# Altium PCB PCB-2024316-000A_NTB.pcbdoc
Units mm, origin at the board's own origin, x right, y up, seen from the top; angles counter-clockwise.
Board outline 24 x 76 mm, 2 copper layers (Top Layer, Bottom Layer), stack 1.571 mm thick; 49 components, 27 nets, 167 pads, 42 vias.
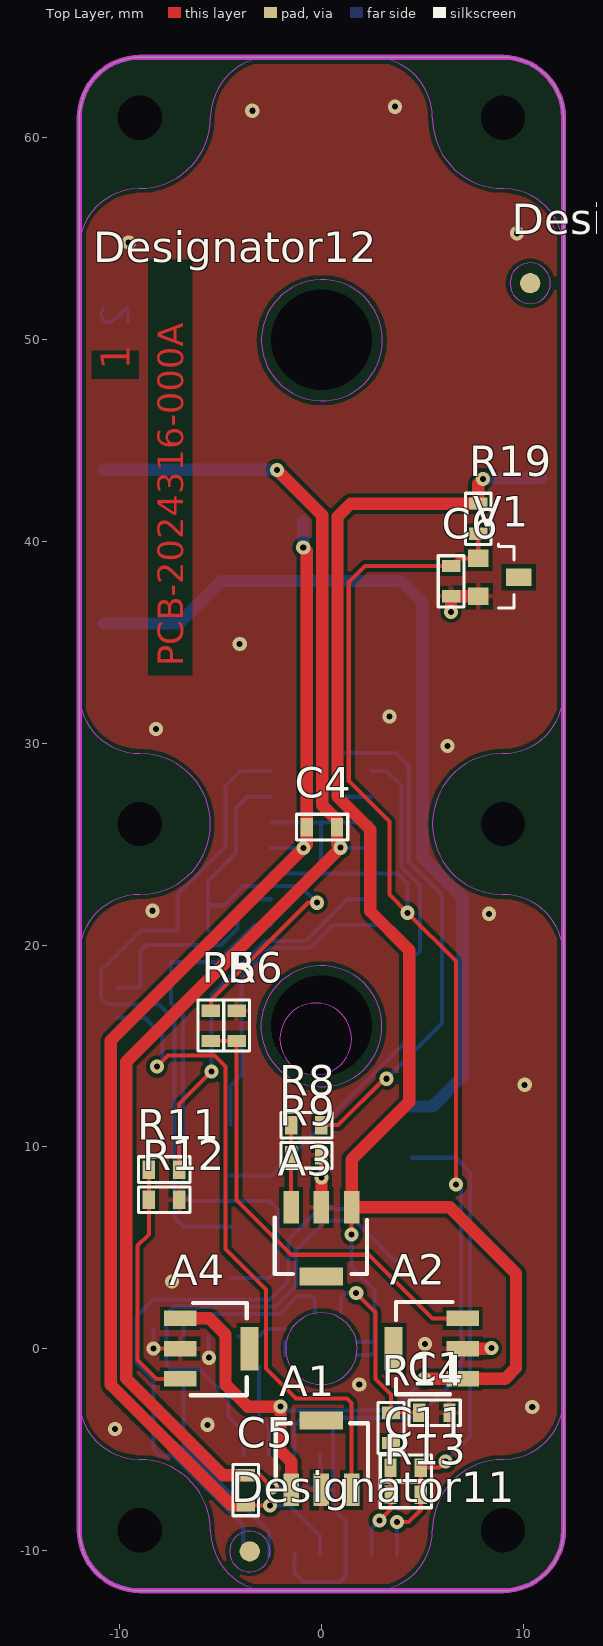
[diagram p0: Top Layer view]
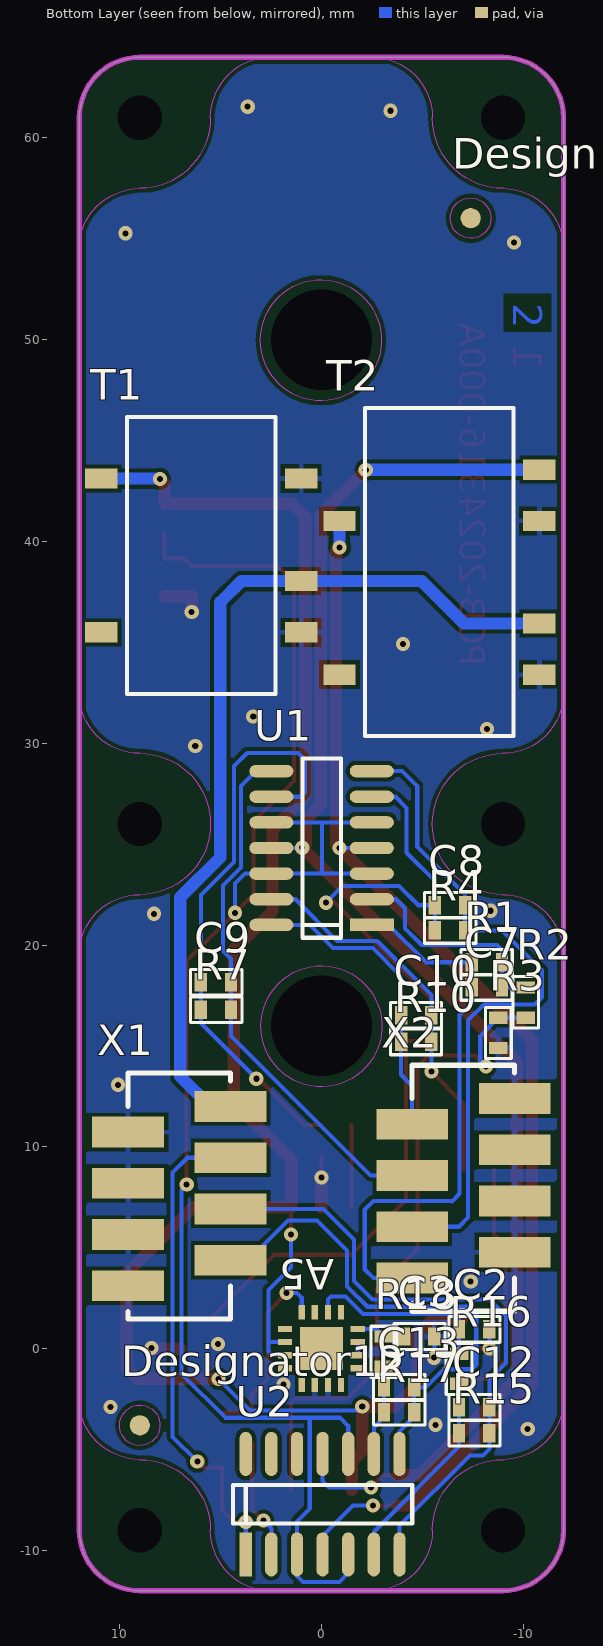
[diagram p1: Bottom Layer view, seen from below]
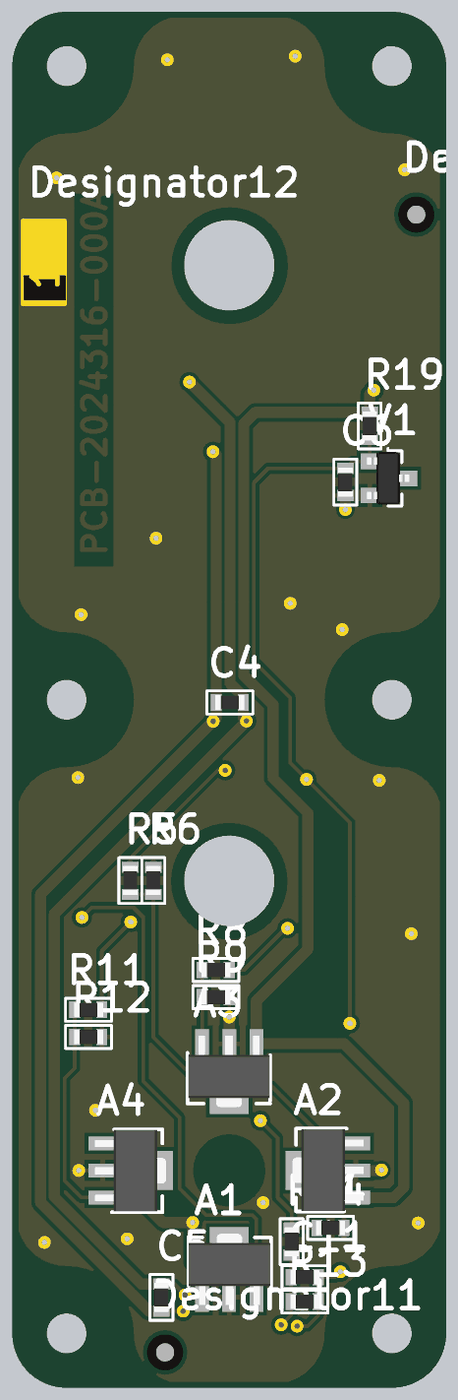
[diagram p2: 3D render of the assembled board from above, using the file's embedded part models]
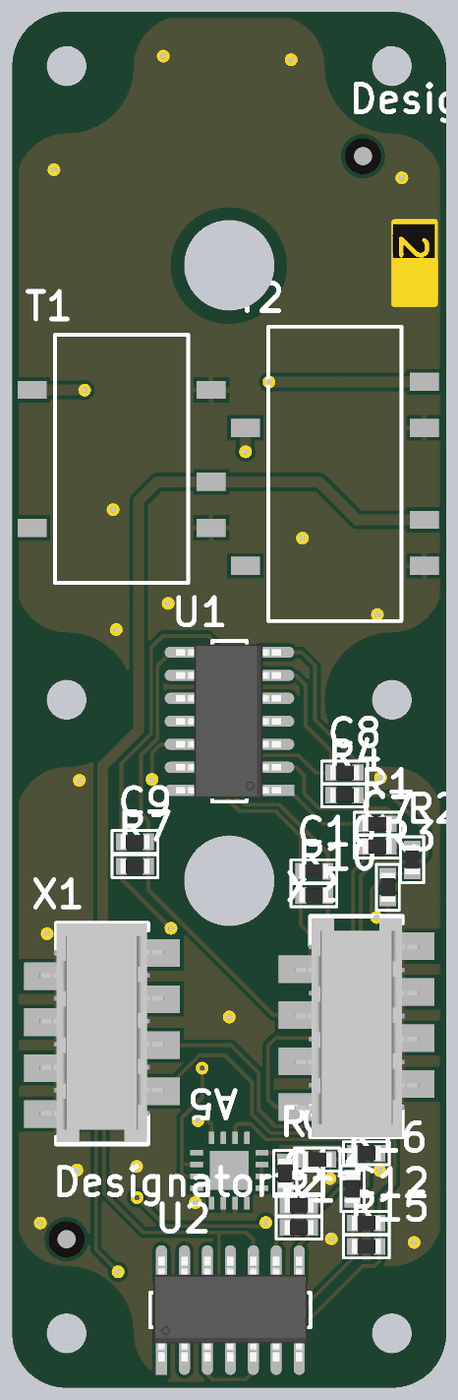
[diagram p3: 3D render of the assembled board from below, using the file's embedded part models]

## Layer stack, top to bottom
Top Layer: signal copper 0.0356
Dielectric: core 1.5, FR-4, Dk 4.8
Bottom Layer: signal copper 0.0356

## Board outline
-12,-9 ccw(c-9,-9) -9,-12 9,-12 ccw(c9,-9) 12,-9 12,61 ccw(c9,61) 9,64 -9,64 ccw(c-9,61) -12,61

## Design rules (kind name [scope] priority, off if disabled: settings)
Clearance Clearance_Polygon [InPolygon] p1: gap=0.203
Clearance [All] p2: gap=0.152
FabricationTestPointUsage TestPointUsage [All] p1: valid=0 allowmultiple=FALSE
FabricationTestpoint Testpoint [All] p1: side=3 testpointundercomponent=TRUE minsize=1.016 maxsize=2.54 preferedsize=1.524 minholesize=0 maxholesize=1.016 preferedholesize=0.813 testpointgrid=0.025 allowsidetop=TRUE allowsidebottom=TRUE usegrid=TRUE gridtolerance=0
HoleSize [All] p1: absolutevalues=TRUE maxlimit=5 minlimit=0.025 maxpercent=80.000 minpercent=20.000
PolygonConnect PolygonConnect_direct [IsVia] p1: connectstyle=Direct reliefconductorwidth=0.254 reliefentries=4 polygonreliefangle="90 Angle"
PolygonConnect [All] p2: connectstyle=Relief reliefconductorwidth=0.254 reliefentries=4 polygonreliefangle="90 Angle"
RoutingVias [All] p1: holewidth=0.3 width=0.7 viastyle="Through Hole" minholewidth=0.3 minwidth=0.7 maxholewidth=0.3 maxwidth=0.7
SilkscreenOverComponentPads [All] p1: minsilkscreentomaskgap=0.254
SolderMaskExpansion [All] p1: expansion=0
Width [All] p1: maxlimit=0.61 minlimit=0.152 preferedwidth=0.203
24 further rules are at their usual default settings.

## Classes and differential pairs
component class EEROS_Sensorplatine: A1 A2 A3 A4 A5 C1 C2 C3 C4 C5 C6 C7 C8 C9 C10 C11 C12 C13 R1 R2 R3 R4 R5 R6 R7 R8 R9 R10 R11 R12 R13 R14 R15 R16 R17 R18 R19 T1 T2 U1 U2 V1 X1 X2

## Components (designator, comment, footprint, x,y, rotation, side; value= is the part's Value field where it differs from the comment)
A1 "SS59ET" SM/SOT89_1234 -1.5,-7 r0 top
A2 "SS59ET" SM/SOT89_1234 7,-1.5 r90 top
A3 "SS59ET" SM/SOT89_1234 1.5,7 r180 top
A4 "SS59ET" SM/SOT89_1234 -7,1.5 r270 top
A5 "LIS344AL" QFN.65M/16/WG4.00 0.975,-1.8 r90 bottom locked
C1 "6.8nF" SM/C_0603_REFLOW 4.85,-3.175 r0 top
C2 "6.8nF" SM/C_0603_REFLOW -6.825,0.95 r180 bottom
C3 "6.8nF" SM/C_0603_REFLOW -4.1,0.6 r180 bottom
C4 "100nF" SM/C_0603_REFLOW -0.725,25.85 r0 top
C5 "100nF" SM/C_0603_REFLOW -3.75,-7.775 r90 top
C6 "100nF" SM/C_0603_REFLOW 6.426,38.786 r270 top
C7 "np" SM/C_0603_REFLOW -8.95,17.9 r0 bottom
C8 "np" SM/C_0603_REFLOW -5.625,21.975 r180 bottom
C9 "np" SM/C_0603_REFLOW 5.975,18.15 r180 bottom
C10 "np" SM/C_0603_REFLOW -5.45,16.525 r0 bottom
C11 "np" SM/C_0603_REFLOW 3.425,-5.9 r0 top
C12 "np" SM/C_0603_REFLOW -6.825,-2.9 r180 bottom
C13 "np" SM/C_0603_REFLOW -3.1,-1.925 r180 bottom
Designator10 "Comment" FIDUCIAL 10.35,52.8 r0 top
Designator11 "Comment" FIDUCIAL -3.55,-10.05 r0 top
Designator12 "Comment" "LAYER LAYER2" -9.375,47.625 r90 top
Designator12 "Comment" FIDUCIAL 9,-3.8 r180 bottom
Designator13 "Comment" FIDUCIAL -7.4,56.025 r180 bottom
R1 "680K" SM/R_0603_REFLOW -8.95,19.15 r0 bottom
R2 "100K" SM/R_0603_REFLOW -10.125,16.4 r90 bottom
R3 "1.0K" SM/R_0603_REFLOW -8.775,16.4 r270 bottom
R4 "680K" SM/R_0603_REFLOW -5.625,20.725 r180 bottom
R5 "100K" SM/R_0603_REFLOW -5.475,15.25 r90 top
R6 "1.0K" SM/R_0603_REFLOW -4.2,15.25 r90 top
R7 "680K" SM/R_0603_REFLOW 5.975,16.8 r180 bottom
R8 "100K" SM/R_0603_REFLOW -1.5,11.075 r0 top
R9 "1.0K" SM/R_0603_REFLOW -1.5,9.575 r0 top
R10 "680K" SM/R_0603_REFLOW -5.45,15.2 r0 bottom
R11 "100K" SM/R_0603_REFLOW -8.55,8.875 r0 top
R12 "1.0K" SM/R_0603_REFLOW -8.55,7.375 r0 top
R13 "130K" SM/R_0603_REFLOW 3.425,-7.25 r0 top
R14 "33K" SM/R_0603_REFLOW 3.45,-3.175 r270 top
R15 "130K" SM/R_0603_REFLOW -6.825,-4.2 r180 bottom
R16 "33K" SM/R_0603_REFLOW -6.825,-0.25 r270 bottom
R17 "130K" SM/R_0603_REFLOW -3.1,-3.15 r180 bottom
R18 "33K" SM/R_0603_REFLOW -3.1,0.6 r270 bottom
R19 "1.0K" SM/R_0603_REFLOW 7.772,41.885 r270 top
T1 "TES1-2411" TES1_SINGLE 1,35.5 r90 bottom
T2 "TES1-2422" TES1_DUAL -10.8,33.4 r90 bottom
U1 "LM324" SOG.050/14/WG.244/L.350 -2.5,21 r90 bottom
U2 "LM324" SOG.050/14/WG.244/L.350 3.75,-10.2 r180 bottom
V1 "LM4040CIM3-2.5" SM/SOT23_123 7.772,37.287 r270 top
X1 "7-188275-8" MICRO-MATCH_8P_SMD 4.5,12 r90 bottom
X2 "7-188275-8" MICRO-MATCH_8P_SMD -4.5,3.5 r270 bottom

## Footprints (in the part's own frame and the unit in brackets; to place one, negate y for a bottom-side part, rotate by r counter-clockwise, add the part's x,y. Pads: shape width x height; smd on the part's side, far side on the other; paste and mask are expansions set on the pad)
FIDUCIAL [mm]
  round 1 smd mask+0.5: 1(0,0)
  Top Layer pour cut-out: 0.3,1.127 0.302,1.126 0.583,1.01 0.585,1.009 0.824,0.826 0.824,0.824 0.826,0.824 1.009,0.585 1.01,0.583 1.011,0.582 1.126,0.304 1.126,0.302 1.127,0.301 1.166,0.001 1.167,0 1.165,-0.004 1.164,-0.008 1.163,-0.009 1.163,-0.01 1.16,-0.011 1.16,-0.011 1.161,-0.012 1.162,-0.016 1.164,-0.02 1.164,-0.021 1.164,-0.022 1.127,-0.3 1.126,-0.302 1.126,-0.304 1.011,-0.582 1.01,-0.583 1.009,-0.585 0.826,-0.824 0.824,-0.824 0.824,-0.826 0.585,-1.009 0.583,-1.01 0.582,-1.011 0.304,-1.126 0.302,-1.126 0.3,-1.127 0.002,-1.166 0,-1.166 -0.002,-1.166 -0.3,-1.127 -0.302,-1.126 -0.304,-1.126 -0.582,-1.011 -0.583,-1.01 -0.585,-1.009 -0.824,-0.826 -0.824,-0.824 -0.826,-0.824 -1.009,-0.585 -1.01,-0.583 -1.011,-0.582 -1.126,-0.304 -1.126,-0.302 -1.127,-0.3 -1.166,-0.002 -1.166,0 -1.166,0.002 -1.127,0.3 -1.126,0.302 -1.126,0.304 -1.011,0.582 -1.01,0.583 -1.009,0.585 -0.826,0.824 -0.824,0.824 -0.824,0.826 -0.585,1.009 -0.583,1.01 -0.582,1.011 -0.304,1.126 -0.302,1.126 -0.3,1.127 -0.002,1.166 0,1.166 0.002,1.166
  Top Layer keep-out circle w0.025: c0,0 r1.005
"LAYER LAYER2" [mm]
MICRO-MATCH_8P_SMD [mil]
  rect 60x140 smd: 1(0,0) 2(-50,200) 3(-100,0) 4(-150,200) 5(-200,0) 6(-250,200) 7(-300,0) 8(-350,200)
  silkscreen extent -415,0 65,200, body extent -411,-35 65,236, height 209
QFN.65M/16/WG4.00 [mil]
  rect 27.57x12 smd: 1(0,0) 2(0,-25.58) 3(0,-51.18) 4(0,-76.77) 9(141.73,-76.77) 10(141.73,-51.18) 11(141.73,-25.58) 12(141.73,0)
  rect 12x27.57 smd: 5(32.48,-109.25) 6(58.07,-109.25) 7(83.67,-109.25) 8(109.25,-109.25) 13(109.25,32.48) 14(83.67,32.48) 15(58.07,32.48) 16(32.48,32.48)
  rect 84x84 smd: M1(70.87,-38.38)
SM/C_0603_REFLOW [mil]
  rect 24x36 smd: 1(0,0) 2(59,0)
  silkscreen extent -20,-25 80,25, body extent -1,-16 61,16, height 16
SM/R_0603_REFLOW [mil]
  rect 24x36 smd: 1(0,0) 2(59,0)
  silkscreen extent -20,-25 80,25, body extent -1,-16 61,16, height 16
SM/SOT23_123 [mil]
  rect 34x40 smd: 1(-74,0) 2(0,0)
  rect 34x50 smd: 3(-37,79)
  silkscreen extent -102,40 23,70, body extent -95,-6 20,86, height 39
SM/SOT89_1234 [mil]
  rect 30x63 smd: 1(0,0) 2(59,0) 3(118,0)
  rect 85x35 smd: 4(59,135)
  silkscreen extent -30,20 150,130, body extent -29,-17 148,138, height 55
SOG.050/14/WG.244/L.350 [mil]
  rect 24x86 smd: 1(0,0)
  oval 24x86 smd: 2(50,0) 3(100,0) 4(150,0) 5(200,0) 6(250,0) 7(300,0) 8(300,196) 9(250,196) 10(200,196) 11(150,196) 12(100,196) 13(50,196) 14(0,196)
  silkscreen extent -25,60 325,136, body extent -18,-14 318,214, height 69
TES1_DUAL [mm]
  rect 1x1.6 smd: 1(0,0) 3(2.54,0) 7(7.62,0) 9(10.16,0) 12(7.62,9.906) 18(0,9.906)
  silkscreen extent -3.05,1.27 13.21,8.64, body extent -3.05,1.02 13.21,8.89, height 7.11
TES1_SINGLE [mm]
  rect 1x1.6 smd: 1(0,0) 3(2.54,0) 7(7.62,0) 8(7.62,9.906) 14(0,9.906)
  silkscreen extent -3.05,1.27 10.67,8.64, body extent -3.05,1.02 10.67,8.89, height 7.11

## Part data
A1 A2 A3 A4: library part 2024317, "S_ SEN MAGNE SS59ET_________________ ___"
A5: library part 2024318, "S_ SEN ACCEL LIS344AL_______________ ___"
C1 C2 C3: library part 239551, "SC CAP __0603 __6n80 _50V ___10% X7R ___"
C4 C5 C6: library part 208013, "SC CAP __0603 100N00 _25V 80/20% Y5V ___"
C7 C8 C9 C10 C11 C12 C13: library part "CAP NP"
R1 R4 R7 R10: library part 226186, "SC RES __0603 680K00 __0W1 ___1% T100 __"
R2 R5 R8 R11: library part 200141, "SC RES __0603 100K00 __0W1 ___1% T100 __"
R3 R6 R9 R12 R19: library part 200139, "SC RES __0603 __1K00 __0W1 ___1% T100 __"
R13 R15 R17: library part 240657, "SC RES __0603 130K00 __0W1 ___1% T100 __"
R14 R16 R18: library part 204505, "SC RES __0603 _33K00 __0W1 ___1% T100 __"
T1: library part 2024319, "SS CNV TES1-2411________ _____5V _1W0 DD"
T2: library part 2024320, "SD CNV TES1-2422________ _+/-12V _1W0 DD"
U1 U2: library part 204061, "S_ IC_ _____SO14 LM324M*/NOPB________ __"
V1: library part 206446, "S_ IC_ ____SOT23 LM4040CIM3-2.5/NOPB_ __"
X1 X2: library part 249627, "S_ CON F ST ____ ___8P ____ __ R1.27 ___"

## Free pads (board coordinates)
  round 0.025 hole 2.2 unplated: 0(-9,-9) 0(-9,26) 0(-9,61) 0(9,-9) 0(9,26) 1(9,61)
  round 0.025 hole 5 unplated: 0(0,16) 0(0,50)

## Via types
v1: diameter 0.7, hole 0.3, Top Layer to Bottom Layer, 42 vias

## Nets (pads, with @x,y where several pads share a name; then routed paths per layer and width w, separated by ;. In a path a pad name is that pad's centre, name@x,y a point inside that pad or via, vN(x,y) a via of type N, cw(c..) or ccw(c..) an arc to the next point about the centre after c; other vN are vias at no path point)
+5V: A1.1 A2.1 A3.1 A4.1 A5.14 A5.15 R19.1 T1.8 | length 97.1
  Top Layer w0.203: v1(1.5,5.65) A3.1
  Top Layer w0.61: A4.1 -5.55,1.5 -4.75,0.7 -4.75,-1.775 -3.65,-2.875 v1(-2.025,-2.875) -2.025,-5.075 -1.5,-5.6 A1.1 ; v1(5.1,-1.5) A2.1 9.1,-1.5 9.65,-0.95 9.65,3.725 6.375,7 A3.1 1.5,9.375 4.35,12.225 4.35,19.75 2.425,21.675 2.425,25.725 0.799,27.351 0.799,41.224 1.45,41.875 7.763,41.875 R19.1 7.772,42.875 v1(8.001,43.104)
  Bottom Layer w0.203: v1(-2.025,-2.875) -1.825,-3.075 -1.083,-3.075 -1.077,-3.069 3.531,-3.069 v1(5.1,-1.5) ; v1(1.5,5.65) 1.5,4.025 2.625,2.9 2.625,0.325 ; A5.15 2.45,-0.325 2.625,-0.15 2.625,0.325 ; A5.14 2.625,0.325
  Bottom Layer w0.61: v1(8.001,43.104) 8.017,43.12 T1.8
+12V: C4.1 C5.1 T2.12 U1.4 U2.4 | length 63
  Top Layer w0.203: C5.1 v1(-2.55,-7.775)
  Top Layer w0.61: C5.1 -4.45,-7.775 -10.437,-1.788 -10.437,15.263 v1(-0.89,24.81) -0.725,24.975 C4.1 -0.725,39.525 v1(-0.9,39.7)
  Bottom Layer w0.203: v1(-2.55,-7.775) -1.575,-7.775 -0.06,-9.29 U2.4@-0.06,-10.25 ; U1.4 v1(-0.89,24.81)
  Bottom Layer w0.61: v1(-0.9,39.7) -0.894,39.706 T2.12
+24V: T1.3 T2.3 X1.1 | length 44.6
  Bottom Layer w0.61: T2.3 -7.06,35.94 -4.96,38.04 T1.3 3.96,38.04 5.011,36.989 5.011,24.348 7,22.359 7,13.5 5.5,12 X1.1
-12V: C4.2 C5.2 T2.9 U1.11 U2.11 | length 74.3
  Top Layer w0.203: C5.2 -3.049,-6.276 v1(-2.45,-6.875)
  Top Layer w0.61: C5.2 -4.871,-6.276 -9.675,-1.472 -9.675,14.2 v1(0.95,24.825) 0.774,25.001 C4.2 0.774,26.201 0.037,26.938 0.037,41.313 v1(-2.2,43.55)
  Bottom Layer w0.203: v1@-2.45,-6.75 v1(-2.45,-6.875) -0.375,-6.875 -0.06,-6.56 U2.11@-0.06,-5.272 ; v1(0.95,24.825) 0.965,24.81 U1.11
  Bottom Layer w0.61: T2.9 -2.21,43.56 v1(-2.2,43.55)
ACCX: C11.2 R13.2 U2.1 X1.3 | length 24.5
  Top Layer w0.203: v1(3.75,-8.6) 4.325,-8.6 4.924,-8.001 R13.2 C11.2 5.85,-5.9 v1(6.15,-5.6)
  Bottom Layer w0.203: U2.1@3.75,-10.25 v1(3.75,-8.6) ; X1.3 6.64,9.46 7.375,8.725 7.375,-4.375 v1(6.15,-5.6)
ACCY: C12.2 R15.2 U2.7 X1.5 | length 31.5
  Bottom Layer w0.203: U2.7@-3.87,-10.25 -3.87,-8.777 -7.36,-5.288 -8.012,-5.288 -8.324,-4.976 R15.2 C12.2 -8.324,-1.55 -9.15,-0.724 -9.15,1.611 -8.331,2.431 -2.544,2.431 -1.625,3.35 -1.625,5.4 -0.105,6.92 X1.5
ACCZ: C13.2 R17.2 U2.8 X1.7 | length 25.7
  Bottom Layer w0.203: U2.8@-3.87,-5.272 -3.87,-4.105 -4.599,-3.376 R17.2 C13.2 -5.15,-1.925 -6.05,-1.025 -7.45,-1.025 -7.675,-0.8 -7.675,1.725 -7.325,2.075 -2.275,2.075 -1.269,3.081 -1.269,4.856 0.225,6.35 1.654,6.35 2.104,5.9 2.104,5.896 3.62,4.38 X1.7
GND: A1.2 A2.2 A3.2 A4.2 A5.2 A5.3 A5.5 A5.6 A5.7 C1.2 C2.2 C3.2 C6.2 R3.2 R6.2 R9.2 R12.2 T1.1 T1.7 T2.1 T2.7 V1.2 X1.2 X1.4 X1.6 X1.8 X2.2 X2.4 X2.6 X2.8 | length 10.1
  Top Layer w0.203: v1(-8.325,0) -8.324,0.001 A4.2 ; R9.2 v1(0,8.475) v1(0,8.475)
  Top Layer w0.61: v1(0,8.475) 0.001,8.474 A3.2 ; v1(6.426,36.5) C6.2 V1.2 ; A2.2 8.399,-0.001 v1(8.425,0.025)
  Bottom Layer w0.203: v1(-8.325,0) -8.324,0.001 C2.2 ; C3.2 -5.599,-0.426 v1(-5.575,-0.45) ; A5.6 A5.7
  other v1: -10.225,-3.975 -5.65,-3.775 10.451,-2.9 1.876,-1.775 5.126,0.225 -7.4,3.325 10.076,13.075 8.301,21.55 -8.374,21.7 6.251,29.875 -8.199,30.7 3.376,31.325 -4.049,34.925 -9.549,54.825 9.701,55.275 -3.424,61.35 3.651,61.55
HAL1: C7.2 R1.2 U1.1 X2.1 | length 28
  Bottom Layer w0.203: X2.1 -2.575,3.5 -2.15,3.925 -2.15,6.9 -2.575,7.325 -6.45,7.325 -6.475,7.3 -6.85,7.675 -6.85,16.525 -7.451,17.126 C7.2 R1.2 -5.175,19.15 -3.325,21 U1.1
HAL2: C8.2 R4.2 U1.7 X2.3 | length 33.5
  Bottom Layer w0.203: X2.3 -6.815,6.04 -7.275,6.5 -7.275,16.275 -8.05,17.05 -10.575,17.05 -10.925,17.4 -10.925,18.75 -8.95,20.725 R4.2 C8.2 -7.124,22.501 -4.75,24.875 -4.75,27.875 -4.005,28.62 U1.7
HAL3: C9.2 R7.2 U1.8 X2.5 | length 26.6
  Bottom Layer w0.203: X2.5 -2.445,8.58 4.476,15.501 R7.2 C9.2 4.476,19.301 4.879,19.704 4.879,22.946 4.631,23.194 4.631,23.197 3.975,23.853 3.975,27.875 3.23,28.62 U1.8
HAL4: C10.2 R10.2 U1.14 X2.7 | length 15.9
  Bottom Layer w0.203: X2.7 -4.5,13.025 -3.951,13.574 R10.2 C10.2 -3.951,18.449 -2.55,19.85 -0.575,19.85 0.575,21 U1.14 U1.14@3.3,21
NetA1_3: A1.3 R2.1 R3.1 | length 33.2
  Top Layer w0.203: v1(-8.15,13.975) -7.6,14.525 -5.3,14.525 -4.756,13.981 -4.756,4.931 -2.75,2.925 -2.75,-0.984 -1.259,-2.475 1.272,-2.475 1.497,-2.7 A1.3
  Bottom Layer w0.203: R2.1 R3.1 -7.875,15.5 -7.875,14.25 v1(-8.15,13.975)
NetA2_3: A2.3 R5.1 R6.1 | length 22.8
  Top Layer w0.203: R5.1 R6.1 -4.2,7.375 -1.475,4.65 2.35,4.65 5.503,1.497 A2.3
NetA3_3: A3.3 R8.1 R9.1 | length 4.1
  Top Layer w0.203: R8.1 R9.1 -1.497,9.572 A3.3
NetA4_3: A4.3 R11.1 R12.1 | length 12.2
  Top Layer w0.203: R11.1 R12.1 -8.55,5.666 -9.116,5.1 -9.116,-0.559 -8.178,-1.497 A4.3
NetC7_1: C7.1 R1.1 R2.2 U1.2 | length 11.1
  Bottom Layer w0.203: R2.2 -8.951,17.899 C7.1 R1.1 -8.95,19.75 -8.7,20 -4.975,20 -4.15,20.825 -4.15,21.825 -3.705,22.27 U1.2
NetC8_1: C8.1 R4.1 R5.2 U1.6 | length 22.5
  Top Layer w0.203: R5.2 -5.475,17.275 -0.65,22.1 v1(-0.225,22.1)
  Bottom Layer w0.203: R4.1 C8.1 ; U1.6 -3.675,27.35 -4.225,26.8 -4.225,24.575 -5.625,23.175 C8.1 ; v1(-0.225,22.1) -1.05,22.925 -3.85,22.925 -4.8,21.975 C8.1
NetC9_1: C9.1 R7.1 R8.2 U1.9 | length 28.8
  Top Layer w0.203: R8.2 0.825,11.075 3.126,13.376 v1(3.225,13.376)
  Bottom Layer w0.203: U1.9 1.025,27.35 0.825,27.55 0.825,29.2 1.15,29.525 3.675,29.525 4.331,28.869 4.331,24.119 5.975,22.475 C9.1 R7.1 5.975,16.125 v1(3.225,13.376)
NetC10_1: C10.1 R10.1 R11.2 U1.13 | length 19.2
  Top Layer w0.203: R11.2 -7.051,12.124 v1(-5.45,13.725)
  Bottom Layer w0.203: v1(-5.45,13.725) R10.1 C10.1 -5.45,17.525 -2.769,20.206 -0.775,20.206 1.289,22.27 U1.13
NetC11_1: C11.1 R13.1 R14.2 U2.2 | length 6
  Top Layer w0.203: v1(2.875,-8.525) 3.425,-7.975 R13.1 C11.1 3.425,-4.699 R14.2
  Bottom Layer w0.203: U2.2@2.48,-10.25 2.48,-8.92 v1(2.875,-8.525)
NetC12_1: C12.1 R15.1 R16.2 U2.6 | length 10.3
  Bottom Layer w0.203: R16.2 C12.1 R15.1 -6.825,-4.85 -2.6,-9.075 U2.6@-2.6,-10.25
NetC13_1: C13.1 R17.1 R18.2 U2.9 | length 4.6
  Bottom Layer w0.203: R18.2 C13.1 R17.1 -3.1,-3.4 -2.6,-3.9 U2.9@-2.6,-5.272
VOUTX: A5.12 C1.1 R14.1 | length 9.6
  Top Layer w0.203: v1(1.725,2.75) 2.675,1.8 2.675,-1.5 3.45,-2.275 R14.1 C1.1
  Bottom Layer w0.203: A5.12 0.975,2.525 1.2,2.75 v1(1.725,2.75)
VOUTY: A5.10 C2.1 R16.1 | length 9.5
  Bottom Layer w0.203: R16.1 C2.1 -6.825,1.625 -6.731,1.719 -2.056,1.719 -1.2,2.575 -0.475,2.575 -0.325,2.425 A5.10
VOUTZ: A5.8 C3.1 R18.1 | length 2.5
  Bottom Layer w0.203: C3.1 R18.1 -2.725,0.975 A5.8
VREF: C6.1 R19.2 U1.3 U1.5 U1.10 U1.12 U2.3 U2.5 U2.10 V1.1 | length 88.2
  Top Layer w0.203: v1(6.675,8.125) 6.675,19.2 v1(4.275,21.6) 3.368,22.507 3.368,26.125 1.358,28.135 1.358,37.983 2.161,38.786 C6.1 6.807,39.167 V1.1 R19.2
  Bottom Layer w0.203: U1.3 -0.025,23.54 ; U1.5 -0.025,26.08 ; U2.5 -1.33,-11.116 -0.889,-11.557 0.921,-11.557 1.21,-11.268 U2.3 1.21,-8.56 0.575,-7.925 0.575,-3.425 ; U2.10@-1.33,-5.272 U2.10 -1.33,-3.825 -0.93,-3.425 0.575,-3.425 ; U1.10 -0.025,26.08 ; v1(4.275,21.6) 4.275,23.05 3.785,23.54 U1.12 -0.025,23.54 ; v1(6.675,8.125) 6.925,7.875 6.925,-1.25 4.75,-3.425 0.575,-3.425 ; -0.025,23.54 -0.025,26.08
pads on no net: A1.4 A2.4 A3.4 A4.4 A5.1 A5.4 A5.9 A5.11 A5.13 A5.16 A5.M1 Designator10.1 Designator11.1 Designator12.1 Designator13.1 T1.14 T2.18 U2.12 U2.13 U2.14 V1.3

## Polygon pours and split planes (outlines as drawn)
GND on Bottom Layer "Top Layer-No Net" (solid, remove dead copper, pour order 4): -12.05,-8.875 -12.05,61.125 cw(c-9.05,61.125) -9.05,64.125 8.95,64.125 cw(c8.95,61.125) 11.95,61.125 11.95,-8.875 cw(c8.95,-8.875) 8.95,-11.875 -9.05,-11.875 cw(c-9.05,-8.875)
GND on Top Layer "Top Layer-No Net" (solid, remove dead copper, pour order 3): -11.928,-9.032 -11.928,60.968 cw(c-8.928,60.968) -8.928,63.968 9.072,63.968 cw(c9.072,60.968) 12.072,60.968 12.072,-9.032 cw(c9.072,-9.032) 9.072,-12.032 -8.928,-12.032 cw(c-8.928,-9.032)

## Keep-outs
Top Layer:
  circle w0.025: c0.025,49.975 r3
  circle w0.025: c0,15.975 r3
  circle w0.025: c-0.275,15.35 r1.778
  circle w0.025: c0,0 r1.778
Bottom Layer:
  circle w0.025: c0,15.975 r3
  circle w0.025: c0.025,49.975 r3
Keep-Out Layer:
  lines w0.025: -9,22.5 ccw(c-9,19.5) -12,19.5 -12,-2.5 ccw(c-9,-2.5) -9,-5.5 cw(c-9,-9) -5.5,-8.995 ; -9,57.5 ccw(c-9,54.5) -12,54.5 -12,32.5 ccw(c-9,32.5) -9,29.5 cw(c-9,26) -5.5,26 cw(c-9,26) -8.995,22.5 ; -8.995,57.5 ccw(c-9,61) -5.5,61 cw(c-2.5,61) -2.5,64 2.5,64 cw(c2.5,61) 5.5,61 ; -5.5,-9 ccw(c-2.5,-9) -2.5,-12 2.5,-12 ccw(c2.5,-9) 5.5,-9 cw(c9,-9) 8.995,-5.5 ; 5.5,60.995 ccw(c9,61) 9,57.5 cw(c9,54.5) 12,54.5 12,32.5 cw(c9,32.5) 9,29.5 ; 8.995,29.5 ccw(c9,26) 5.5,26 ccw(c9,26) 9,22.5 cw(c9,19.5) 12,19.5 12,-2.5 ; 9,-5.5 ccw(c9,-2.5) 12,-2.5 ; 12,-2.5 ccw(c12,-2.5) 12,-2.5
  lines w0.254: -12,-9 ccw(c-9,-9) -9,-12 9,-12 ccw(c9,-9) 12,-9 12,61 ccw(c9,61) 9,64 -9,64 ccw(c-9,61) -12,61 -12,-9

## Other copper
Top Layer:
  text "PCB-2024316-000A" at -6.85,33.825 h1.27 r90

## Silkscreen, mask and mechanical layers (free items; w line width, h text height)
Top Overlay:
  text "Silkscreen Top" at 105.5,-72 h4
Bottom Overlay:
  text "Silkscreen Bottom" at 105.5,-72 h4
Mechanical 1:
  the board outline again, w0
Mechanical 3:
  text "Bluemask Bottom" at 105.5,-72 h4
Mechanical 5:
  text "Gluemask Bottom" at 105.5,-72 h4
Mechanical 11:
  lines w0.203: -15.215,1.803 -15.215,5.867
Mechanical 16:
  the board outline again, w0.254

## Text inside footprints (layer, text, board x,y; h text height)
Designator12: Top Layer "1" at -9.502,48.514 h1.43 r90; Bottom Layer "2" at -9.502,51.816 h1.43 r90